# EAGLE board Batt_Light_2_Wrong (EAGLE 7.1.0)
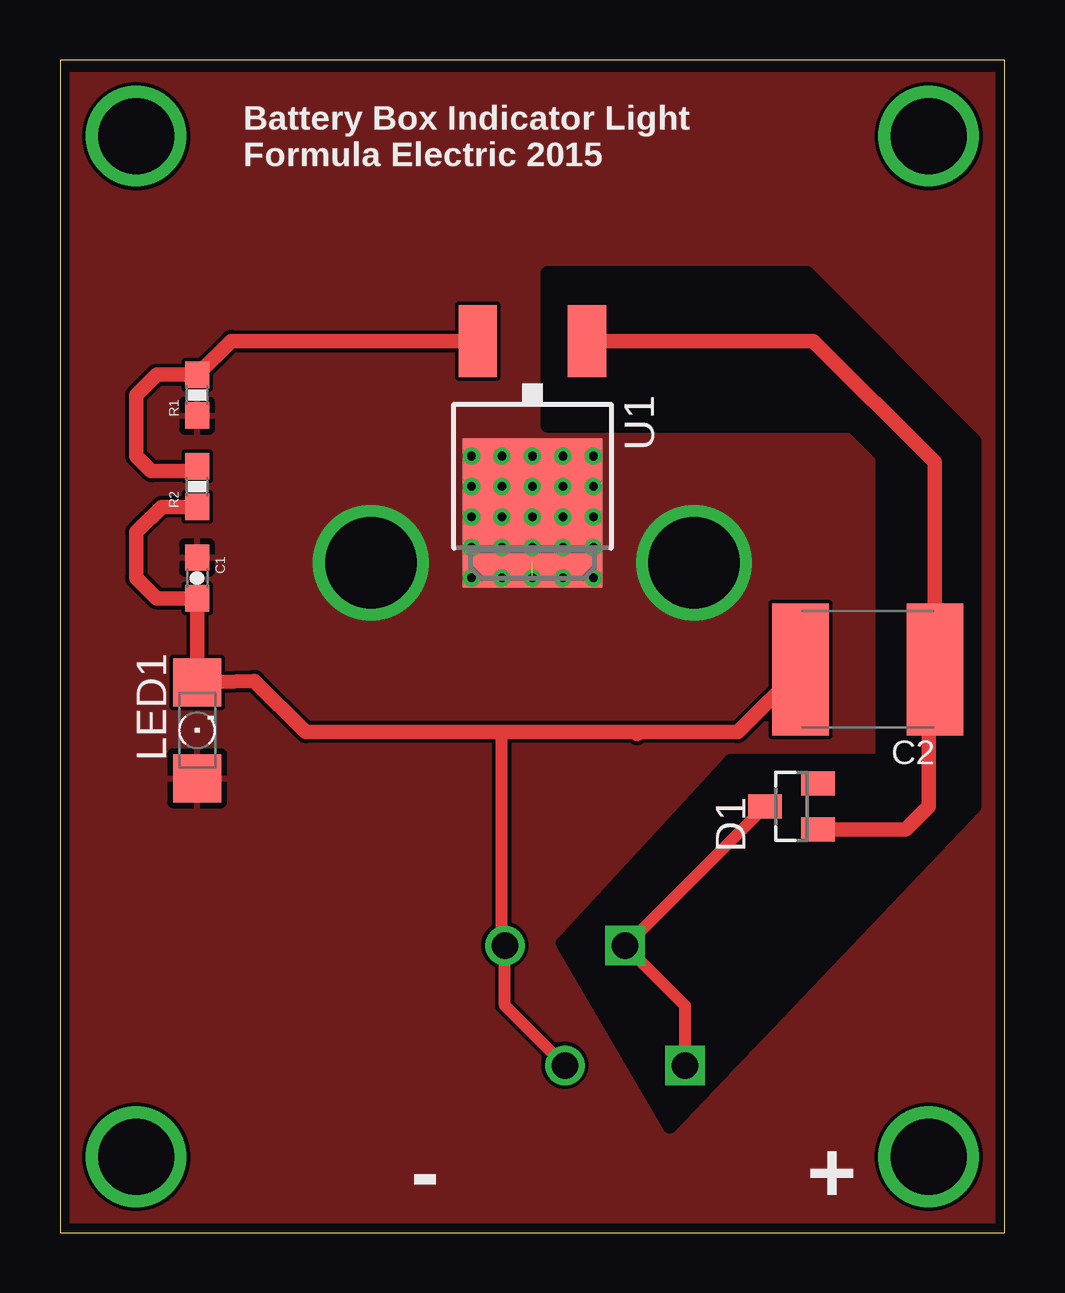
[diagram p0: board, top side]
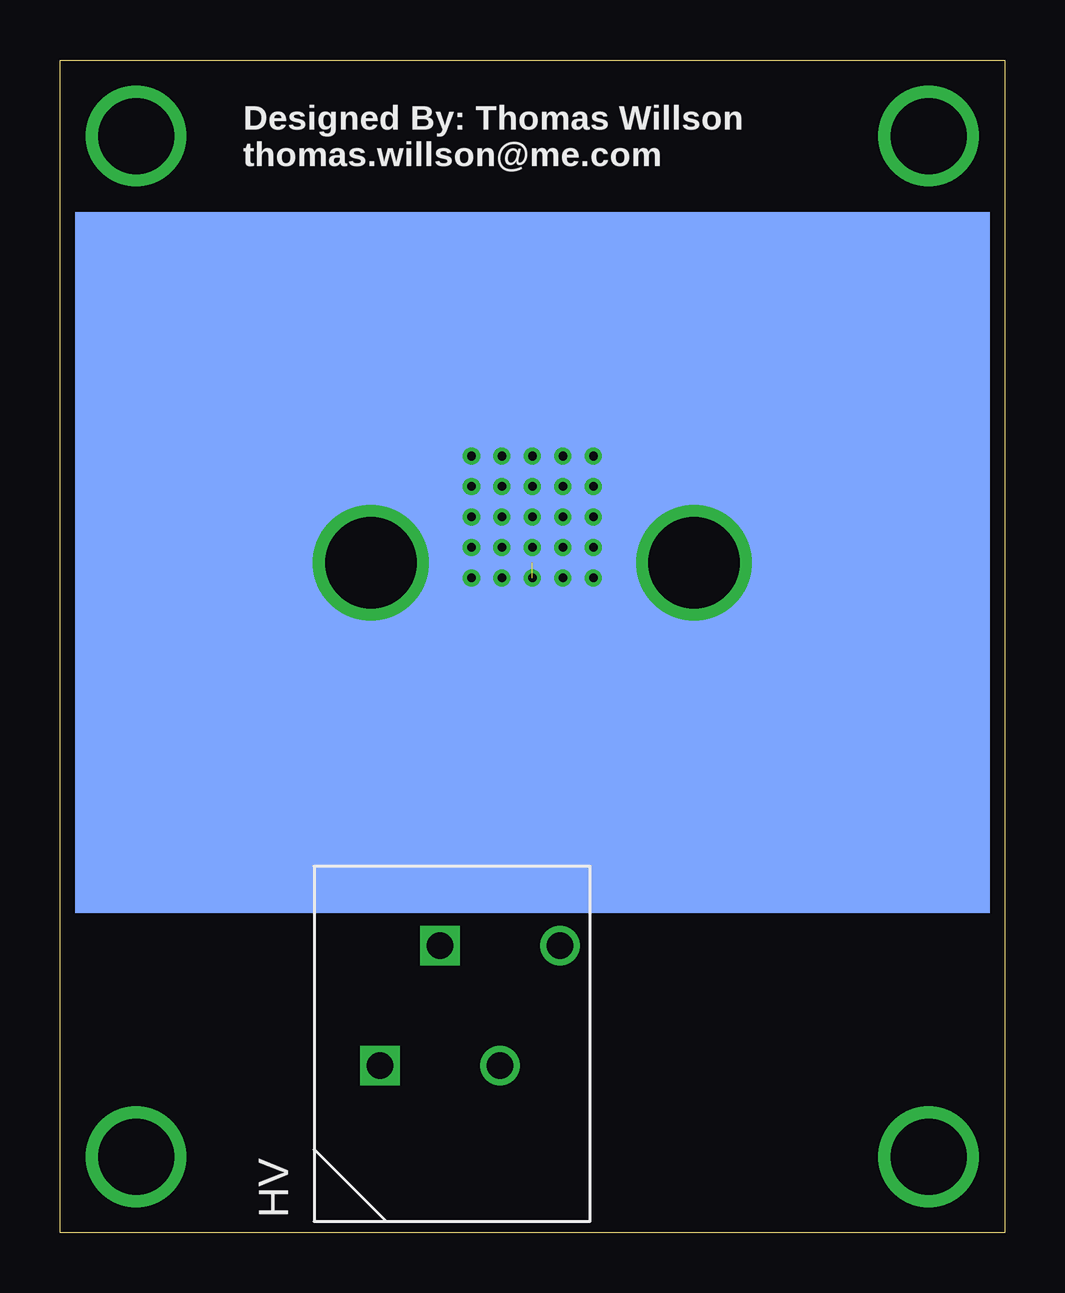
[diagram p1: board, bottom side, seen from below]

Size 39.37 x 48.9 mm. Coordinates in mm from the lower left corner, seen from the top.
Outline: 0,0 39.37,0 39.37,48.9 0,48.9 0,0
Copper layers (1*16): Top 0.0356mm / dielectric 1.5011mm / Bottom 0.0356mm
Design rules "OshPark DRC": minimum track width 6mil, minimum drill 13mil, track to track 6mil, track to pad 6mil, pad to pad 6mil, via to via 6mil, smd to smd 6mil, copper to edge 15mil, drill to drill 6mil, minimum pad ring 7mil, minimum via ring 7mil, stop-mask expansion 3mil, vias tented up to drill 0mil, thermal gap 10mil
tRestrict: area 20.3,4.4 to 38.1,40

## Footprints (pad centres in the part's own frame; a part is rotated, then mirrored left to right if it is on the bottom)
0603-CAP = smd 1.1 x 1: 1 -0.85,0; 2 0.85,0
C2220 = smd 2.35 x 5.5: 1 -2.8,0; 2 2.8,0
SOT23 = smd 1 x 1.4: 1 -0.95,-1.1; 2 0.95,-1.1; 3 0,1.1
CONNECTOR_2 = drill 1.1 square: 1 0,0; 2 2.5,5 | drill 1.1: 3 5,0; 4 7.5,5
1206 = smd 2 x 2: A -2,0; C 2,0
0603-RES = smd 1.1 x 1: 1 -0.85,0; 2 0.85,0
DPACK = smd 1.6 x 3: 1 -2.28,-4.8; 3 2.28,-4.8 | smd 5.8 x 6.2: 4 0,2.38
TO-200_DUAL = smd 38.1 x 29.21: P$1 0,0 | drill 3.81: P$2 -6.731,0; P$3 6.731,0

## Placement (x,y rotation side)
C1  .1uF  [0603-CAP]  5.71,27.3 270 top
C2  .1uF  [C2220]  33.66,23.5 180 top
D1  51V  [SOT23]  30.48,17.78 90 top
HV  CONN_2  [CONNECTOR_2]  26.04,6.99 0 bottom
LED1  [1206]  5.71,20.95 90 top
R1  3.3k  [0603-RES]  5.71,34.92 90 top
R2  10k  [0603-RES]  5.71,31.11 90 top
U1  LR8DPACK  [DPACK]  19.68,32.38 180 top
U$1  CTS_7-340-2PP-BA  [TO-200_DUAL]  19.68,27.94 180 bottom

## Library data of the parts
C1 = SparkFun-Capacitors
C2 = resistor
D1 = diode
HV = formula electric
LED1 = led
R1 R2 = SparkFun-Resistors
U1 = microchip
U$1 = heatsink

## Nets
HV+: D1.3 HV.1 HV.2
HV-: C1.2 C2.2 HV.3 HV.4 LED1.C R2.1
N$: C2.1 D1.1 U1.1
N$1: R1.2 R2.2 U1.3
N$2: C1.1 LED1.A R1.1 U1.4 U$1.P$1 U$1.P$2 U$1.P$3

## Tracks (layer width: path | path; a pad name or v marks a point on that pad's centre or on a via)
HV+
  Top 0.508: D1.3 23.59,11.98 HV.2 26.04,9.48 HV.1
HV-
  Top 0.508: HV.3 18.54,9.48 HV.4 18.41,12.11 18.41,20.88
  Top 0.61: C2.2 28.23,20.88 24.13,20.88 | R2.1 4.23,30.27 3.17,29.21 3.17,27.3 4.03,26.45 C1.2 LED1.C 8.1,23.01 10.24,20.88 18.41,20.88 24.13,20.88 | 24.05,20.8 24.13,20.88
N$
  Top 0.61: U1.1 31.39,37.19 36.45,32.12 C2.1 36.2,23.23 36.2,17.78 35.24,16.83 D1.1
N$1
  Top 0.61: U1.3 7.12,37.19 R1.2 4.03,35.77 3.17,34.92 3.17,32.38 3.81,31.75 5.5,31.75 R2.2
N$2  (via drill 0.36)  (1 unrouted)
  other vias: 17.14,32.38 18.41,32.38 19.68,32.38 20.95,32.38 22.23,32.38 22.23,31.11 20.95,31.11 19.68,31.11 18.41,31.11 17.14,31.11 17.14,29.84 18.41,29.84 19.68,29.84 20.95,29.84 22.23,29.84 22.23,28.57 20.95,28.57 19.68,28.57 18.41,28.57 17.14,28.57 17.14,27.3 18.41,27.3 19.68,27.3 20.95,27.3 22.23,27.3
  pour Top: 0,48.26 0,0 39.37,0 39.37,48.26
N$3  (via drill 3.17)
  other vias: 3.17,45.72
N$4  (via drill 3.17)
  other vias: 36.2,45.72
N$5  (via drill 3.17)
  other vias: 3.17,3.17
N$6  (via drill 3.17)
  other vias: 36.2,3.17

## Text on the board
tNames: Battery Box Indicator Light / Formula Electric 2015 | - | +
bNames: Designed By: Thomas Willson / thomas.willson@me.com